# Altium PCB s_pboard2.PcbDoc
Units mil, origin at the board's own origin, x right, y up, seen from the top; angles counter-clockwise.
Board outline 2160 x 1200 mil, 2 copper layers (Top Layer, Bottom Layer); 19 components, 10 nets, 57 pads, 9 vias.
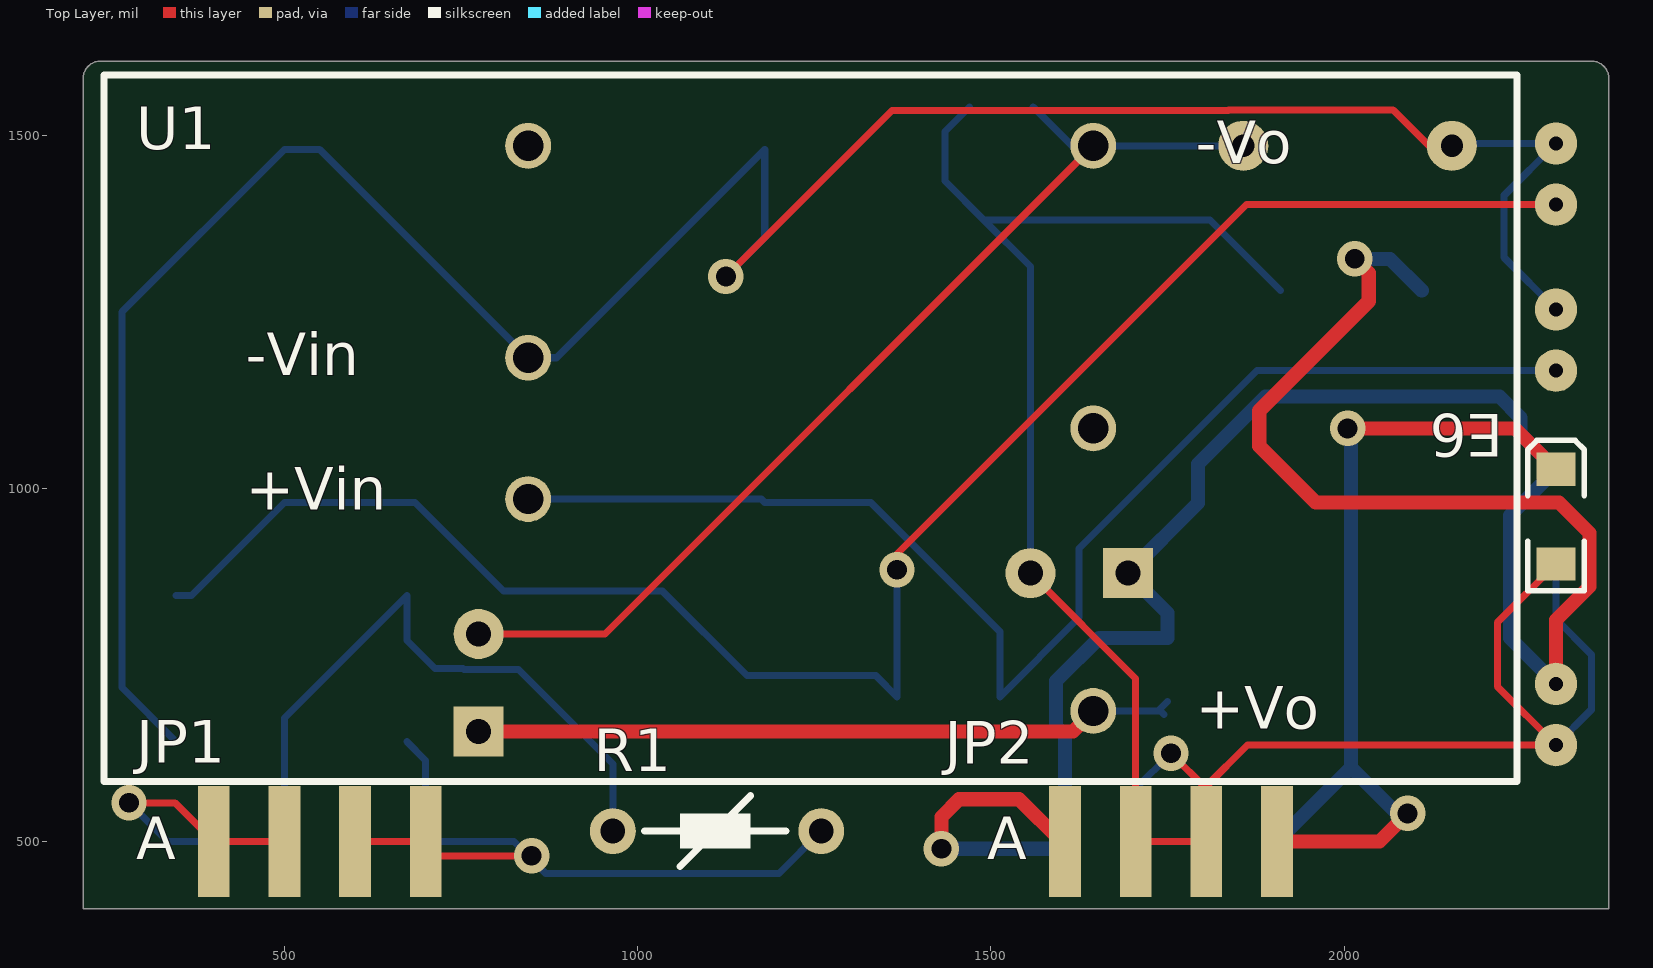
[diagram p0: Top Layer view]
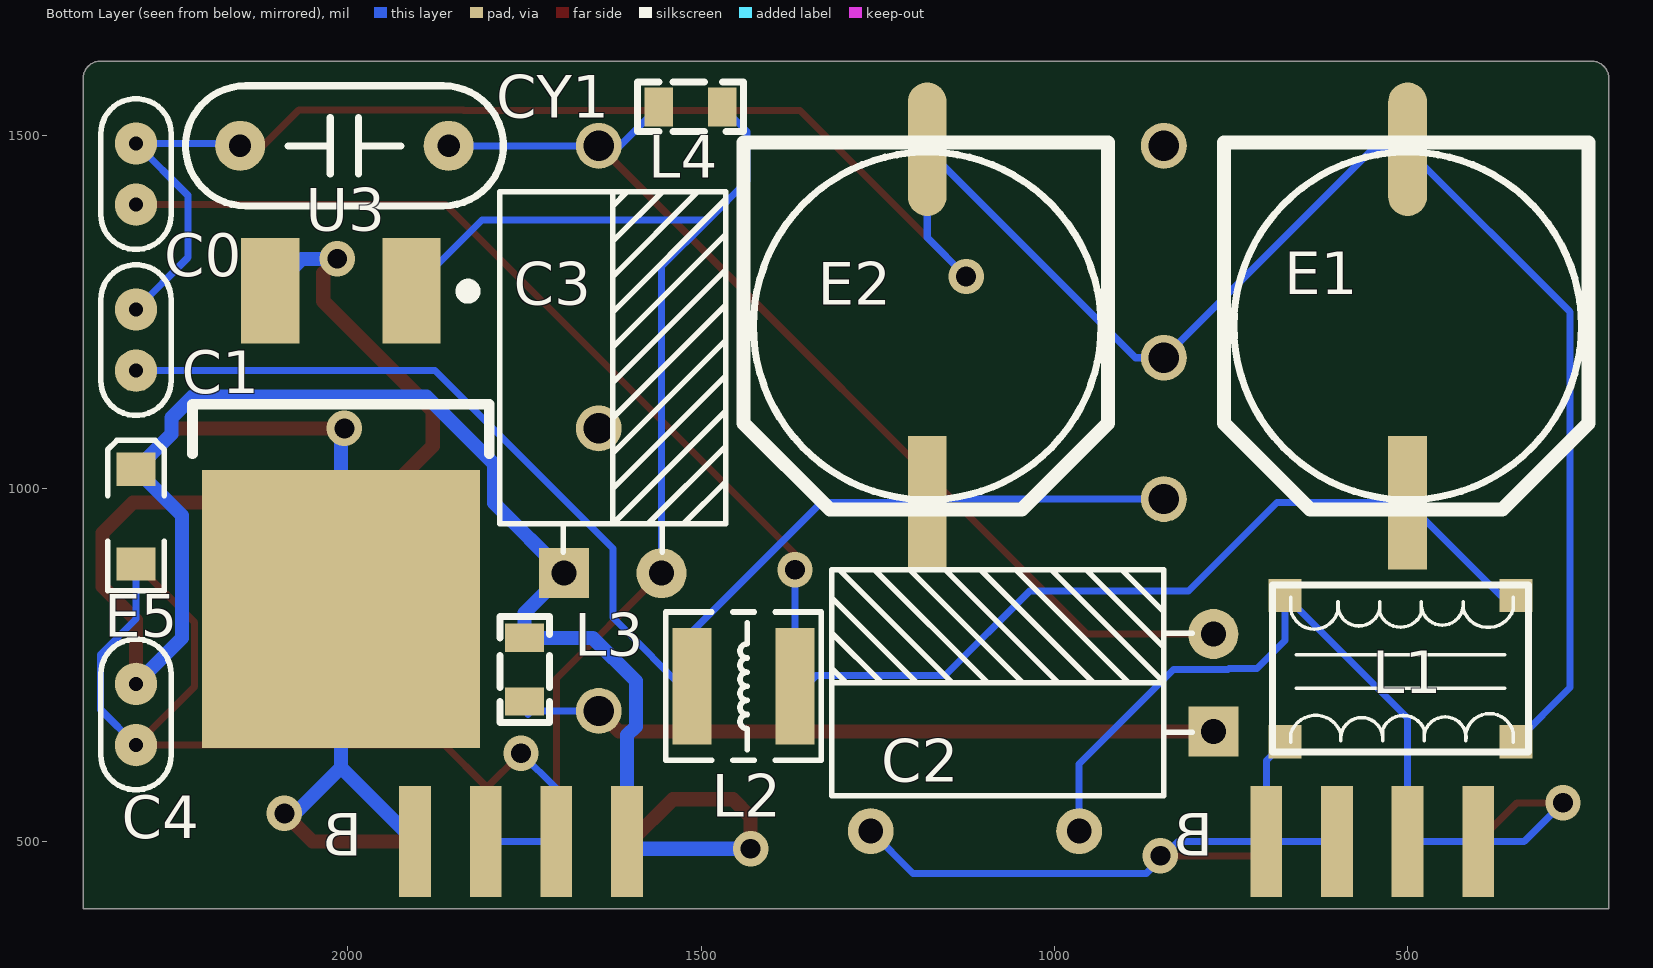
[diagram p1: Bottom Layer view, seen from below]
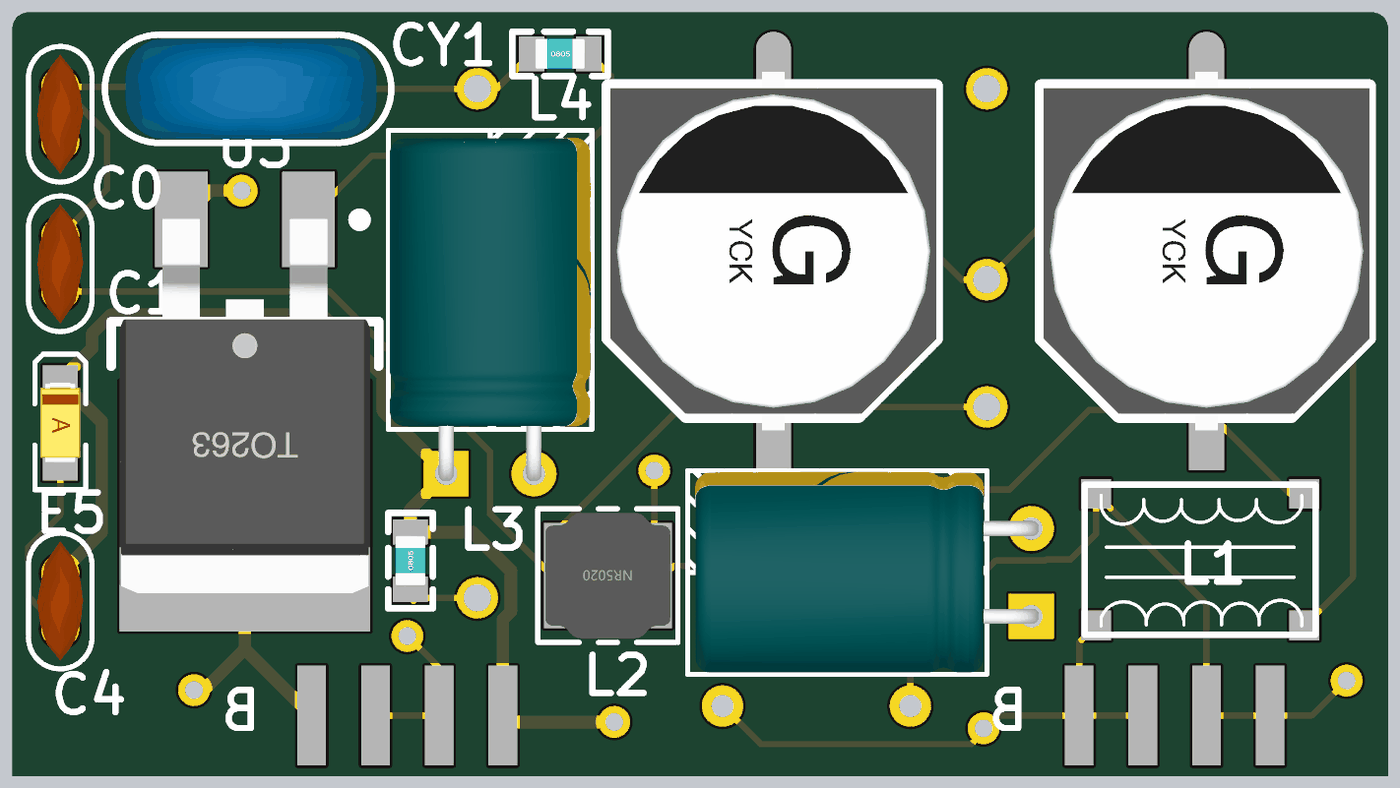
[diagram p2: 3D render of the assembled board from below, using the file's embedded part models]

## Layer stack, top to bottom
Top Solder: solder mask 0.4, Solder Resist, Dk 3.5
Top Layer: signal copper 1.4
Dielectric 1: dielectric 12.6, FR-4, Dk 4.8
Bottom Layer: signal copper 1.4
Bottom Solder: solder mask 0.4, Solder Resist, Dk 3.5

## Board outline
215,405 2375,405 2375,1580 ccw(c2350,1580) 2350,1605 240,1605 ccw(c240,1580) 215,1580

## Design rules (kind name [scope] priority, off if disabled: settings)
Clearance [All] p1: gap=10 ignorepadtopadclearanceinfootprint=FALSE
PolygonConnect [All] p1: connectstyle=Relief reliefconductorwidth=10 reliefentries=4 polygonreliefangle="90 Angle" airgapwidth=10
RoutingVias [All] p1: holewidth=28 width=50 viastyle="Through Hole" minholewidth=28 minwidth=50 maxholewidth=200 maxwidth=200
SolderMaskExpansion [All] p1: expansion=4
UnRoutedNet [All] p1: checkbadconnections=TRUE
Width Width_3v3 [InNet('+3.3')] p1: maxlimit=30 minlimit=15 preferedwidth=20 minimp=50.000000 maximp=50.000000 favimp=50.000000
Width Width_5 [InNet('+5')] p2: maxlimit=30 minlimit=15 preferedwidth=20 minimp=50.000000 maximp=50.000000 favimp=50.000000
Width [All] p3: maxlimit=40 minlimit=10 preferedwidth=10 minimp=50.000000 maximp=50.000000 favimp=50.000000
29 further rules are at their usual default settings.

## Components (designator, comment, footprint, x,y, rotation, side; value= is the part's Value field where it differs from the comment)
C0 "1uF/50V" "CC 2.2*5" 2300,1445 r90 bottom
C1 "1uF/50V" "CC 2.2*5" 2300,1210 r90 bottom
C2 "100uF/高频低阻" "CAP 3.5*8*11.5-H - GD" 775,725 r90 bottom
C3 "100uF/高频低阻" "CAP 3.5*8*11.5-H - GD" 1625,880 r180 bottom
C4 "1uF/50V" "CC 2.2*5" 2300,680 r270 bottom
CY1 "1nF/250V" "CY 7.5*10*4" 2005,1485 r180 bottom
E1 "470uF/50V" "CM G(12.5*13.5)" 500,1230 r270 bottom
E2 "470uF/50V" "CM G(12.5*13.5)" 1180,1230 r270 bottom
E5 "10uF/6.3V" "CD A(3216)" 2300,960 r270 bottom
E6 "10uF/6.3V" "CD A(3216)" 2300,960 r270 top
JP1 "排针-侧 2*4" "排针-侧 2*4" 400,500 r0 top
JP2 "排针-侧 2*4" "排针-侧 2*4" 1605,500 r0 top
L1 "SRF0905-202Y" SRF0905 510,745 r180 bottom
L2 "4.7uH" NR5020 1440,720 r0 bottom
L3 "2.2uH" "L 0805" 1750,743.46 r90 bottom
L4 "10uH" "L 0805" 1515,1540 r180 bottom
R1 "14D330k" 14D330k 1115,515 r180 top
U1 "10D1205B" 10D1205B 245,585 r0 top
U3 "AIC1084-33CM" TO263-3B 2010,829.21 r0 bottom

## Footprints (in the part's own frame and the unit in brackets; to place one, negate y for a bottom-side part, rotate by r counter-clockwise, add the part's x,y. Pads: shape width x height; smd on the part's side, far side on the other; paste and mask are expansions set on the pad)
10D1205B [mil]
  round 65 hole 43: 1(600,600) 2(600,400) 3(1400,100) 4(1400,500) 5(1400,900) 6(600,900)
  silkscreen extent 0,0 2000,1000
14D330k [mil]
  round 65 hole 35: 1(-145,0) 2(150,0)
  silkscreen extent -95,-50 105,50
"CAP 3.5*8*11.5-H - GD" [mm] "脚距3.5mm直径8mm高度11.5mm"
  rect 1.8x1.8 hole 0.9: 1(-1.75,0)
  round 1.8 hole 0.9: 2(1.75,0)
  silkscreen extent -4.06,0.76 4.06,13.72, body extent -4,-0.3 4.01,13.41, height 8.03
"CC 2.2*5" [mil] "脚距2.2mm直径5mm"
  round 60 hole 19.68: 1(-43.31,0) 2(43.31,0)
  silkscreen extent -107,-50 107,50, body extent -94,-36 94,36, height 189
"CD A(3216)" [mm] "长3.2mm，宽1.6mm，厚1.6mm"
  rect 1.2x1.4 smd: 1(-1.7,0) 2(1.7,0)
  silkscreen extent -2.74,-1.02 2.67,1.02, body extent -1.6,-0.8 1.6,0.8, height 1.6
"CM G(12.5*13.5)" [mm] "贴片电解电容，直径12.5mm，高13.5mm"
  rect 4.8x1.4 smd: 1(6.35,0)
  oval 4.8x1.4 smd: 2(-6.35,0)
  silkscreen extent -6.6,-6.6 6.6,6.5, body extent -7.15,-6.5 7.15,6.5, height 13.5
"CY 7.5*10*4" [mm] "脚距7.5mm，直径10mm，厚4mm"
  round 1.8 hole 0.8: 1(-3.75,0) 2(3.75,0)
  silkscreen extent -5.71,-2.16 5.71,2.16, body extent -4.88,-2 5.12,2, height 10.2
"L 0805" [mil] "小功率贴片电感"
  rect 40x55 smd: 1(-45,0) 2(45,0)
  silkscreen extent -75,-35 75,35, body extent -39,-24 39,24, height 35
NR5020 [mm] "5.0mm*5.0mm*2.0mm(长*宽*高）"
  rect 1.4x4.2 smd: 1(-1.85,0) 2(1.85,0)
  silkscreen extent -2.79,-2.67 2.79,2.67, body extent -2.5,-2.5 2.5,2.5, height 2.1
SRF0905 [mil]
  rect 47x47 smd: 1(-163.5,-103.5) 2(-163.5,103.5) 3(163.5,103.5) 4(163.5,-103.5)
  silkscreen extent -181,-118 181,118
TO263-3B [mm] "263，3脚晶体管"
  rect 2.1x3.8 smd: 1(-2.54,-11.45) 3(2.54,-11.45)
  rect 10x10 smd: 2(0,0)
  silkscreen extent -5.33,-11.63 5.33,-5.59, body extent -5,-11.46 5,3.47, height 4.5
"排针-侧 2*4" [mil]
  rect 45x157 smd: 1(0,0) 2(100,0) 3(200,0) 4(300,0)
  rect 45x157 smd far side: 5(300,0) 6(200,0) 7(100,0) 8(0,0)

## Part data
C0 C1 C4: library part C-CC, "直插瓷片电容"
C2 C3: library part C-CAP, "直插电解电容"
CY1: library part C-CY, "高压陶瓷电容，Y电容"
E1 E2: library part C-CM, "贴片电解电容"
E5 E6: library part C-CD, "贴片钽电容"
L1: "共模电感"
L2: library part DML-5020, "差模电感"
L3 L4: library part L, "小功率贴片电感"

## Via types
v1: diameter 50, hole 28, Top Layer to Bottom Layer, 9 vias

## Nets (pads, with @x,y where several pads share a name; then routed paths per layer and width w, separated by ;. In a path a pad name is that pad's centre, name@x,y a point inside that pad or via, vN(x,y) a via of type N, cw(c..) or ccw(c..) an arc to the next point about the centre after c; other vN are vias at no path point)
+3.3: E6.1 JP2.4 JP2.5 U3.2 | length 1258.1
  Top Layer w20: JP2.4 2050,500 v1(2090,540) ; v1(2005,1085) 2241.93,1085 E6.1
  Bottom Layer w20: JP2.5 2010,605 ; v1(2005,1085) 2010,1080 U3.2 2010,605 ; v1(2090,540) 2075,540 2010,605
+5: C3.1 C4.1 E5.1 JP2.1 JP2.8 L3.2 U3.3 | length 3323
  Top Layer w20: v1(1430,490) 1430,535 1455,560 1540,560 1600,500 JP2.1 ; v1(2015,1325) 2035,1305 2035,1265 1880,1110 1880,1060 1960,980 2304.25,980 2347.56,936.69 2347.56,861.16 2300,813.61 C4.1
  Bottom Layer w20: v1(1430,490) 1595,490 JP2.8 1605,650.75 1592.5,663.25 1592.5,727.5 1653.46,788.46 L3.2 1750,823.9 C3.1 1793.15,979.25 1793.15,1034.35 1888.8,1130 2220,1130 2250,1100 2250,1076.93 E5.1 2235,961.93 2235,788.31 C4.1 ; v1(2015,1325) 2065,1325 U3.3
+12: JP1.1 JP1.2 JP1.7 JP1.8 L1.2 R1.2 | length 1428.4
  Top Layer w10: v1(280,555) 345,555 JP1.1 JP1.2
  Bottom Layer w10: v1(280,555) 335,500 JP1.8 JP1.7 500,675 L1.2 673.5,784.96 713.46,745 752.57,745 754.11,743.46 831.54,743.46 965,610 R1.2
GND: C3.2 C4.2 E5.2 E6.2 JP2.2 JP2.3 JP2.6 JP2.7 L4.2 U3.1 | length 3264.7
  Top Layer w10: C3.2 1705,731.1 JP2.2 JP2.3 JP2.3@1805,575 ; v1(1755,625) JP2.3@1805,575 ; E6.2 2216.93,810 2216.93,719.76 C4.2 1863.31,636.69 1805,578.39 JP2.3@1805,575
  Bottom Layer w10: L4.2 1435,1505 1435,1435 1490,1380 ; C3.2 1556.1,1313.9 1490,1380 ; v1(1755,625) 1705,575 JP2.7 JP2.6 ; U3.1 1810,1380 1490,1380 ; C4.2 2350,686.69 2350,765 2300,815 E5.2
NetC0_1: C0.1 E1.1 L1.3 L2.1 | length 2528.9
  Top Layer w10: v1(1367.17,885) 1367.17,907.17 1861.69,1401.69 C0.1
  Bottom Layer w10: L1.3 368.5,848.5 E1.1 685,980 810,855 1035,855 1155,735 1337.17,735 1367.17,705 v1(1367.17,885)
NetC0_2: C0.2 C1.2 CY1.1 E1.2 E2.2 L1.4 U1.1 | length 3686.4
  Top Layer w10: v1(1125,1300) 1360,1535 1836.04,1535 1836.47,1535.43 2069.57,1535.43 2120,1485 CY1.1 ; C0.2@2300,1485 C0.2
  Bottom Layer w10: L1.4 270,718 270,1250 E1.2 550,1480 U1.1 885,1185 E2.2 1180,1355 v1(1125,1300) ; CY1.1 2155.94,1488.31 C0.2 2226.69,1415 2226.69,1326.61 C1.2
NetC1_1: C1.1 E2.1 L2.2 U1.2 | length 1873.5
  Bottom Layer w10: U1.2 1175,985 E2.1 1330,980 1512.83,797.17 L2.2 1512.83,705 1625,817.17 1625,915 1876.69,1166.69 C1.1
NetC2_1: C2.1 L3.1 U1.3 | length 999.6
  Top Layer w20: C2.1 1616.1,656.1 U1.3
  Bottom Layer w10: U1.3 1736.54,685 L3.1 ; L3.1@1740,685 L3.1@1745,680
NetC2_2: C2.2 CY1.2 L4.1 U1.5 | length 1476.4
  Top Layer w10: C2.2 953.9,793.9 U1.5
  Bottom Layer w10: L4.1 1615,1485 U1.5 CY1.2
PGND: JP1.3 JP1.4 JP1.5 JP1.6 L1.1 R1.1 | length 1114.3
  Top Layer w10: JP1.3 JP1.4 720,480 v1(850,480)
  Bottom Layer w10: JP1.6 JP1.5 ; L1.1 700,615 JP1.5 ; R1.1 1200,455 870,455 825,500 JP1.5
pads on no net: U1.4 U1.6

## Silkscreen, mask and mechanical layers (free items; w line width, h text height)
Mechanical 1:
  the board outline again, w10

## Text inside footprints (layer, text, board x,y; h text height)
JP1: Top Overlay "A" at 290,475 h60; Bottom Overlay "B" at 775,480 h60
JP2: Top Overlay "A" at 1495,475 h60; Bottom Overlay "B" at 1980,480 h60
U1: Top Overlay "-Vin" at 445,1160 h60; Top Overlay "+Vin" at 445,970 h60; Top Overlay "+Vo" at 1790,660 h60; Top Overlay "-Vo" at 1790,1460 h60